# EAGLE board DX-HR (EAGLE 6.6.0)
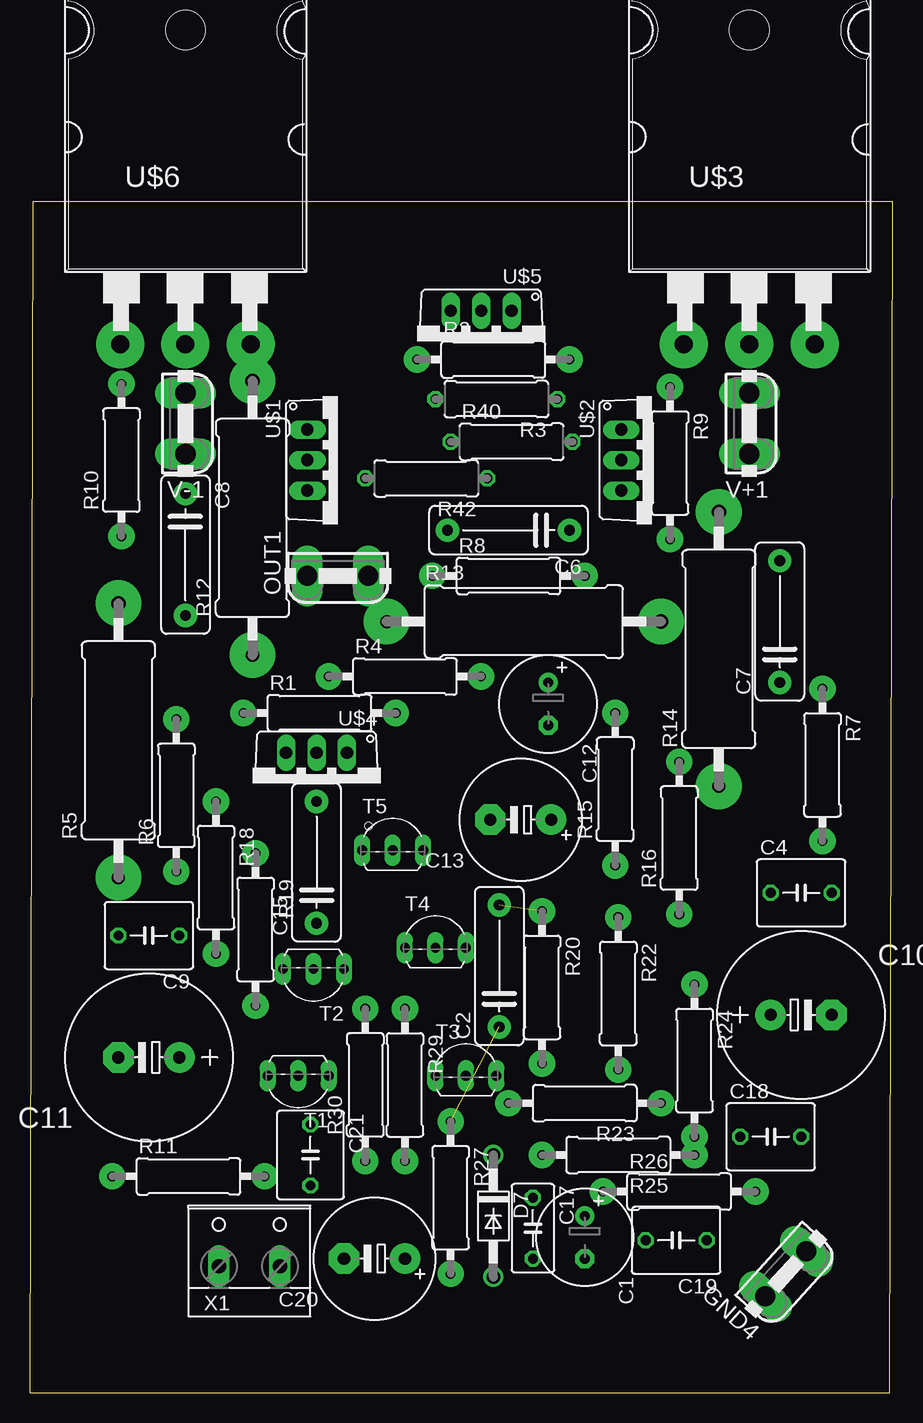
[diagram p0: board, top side]
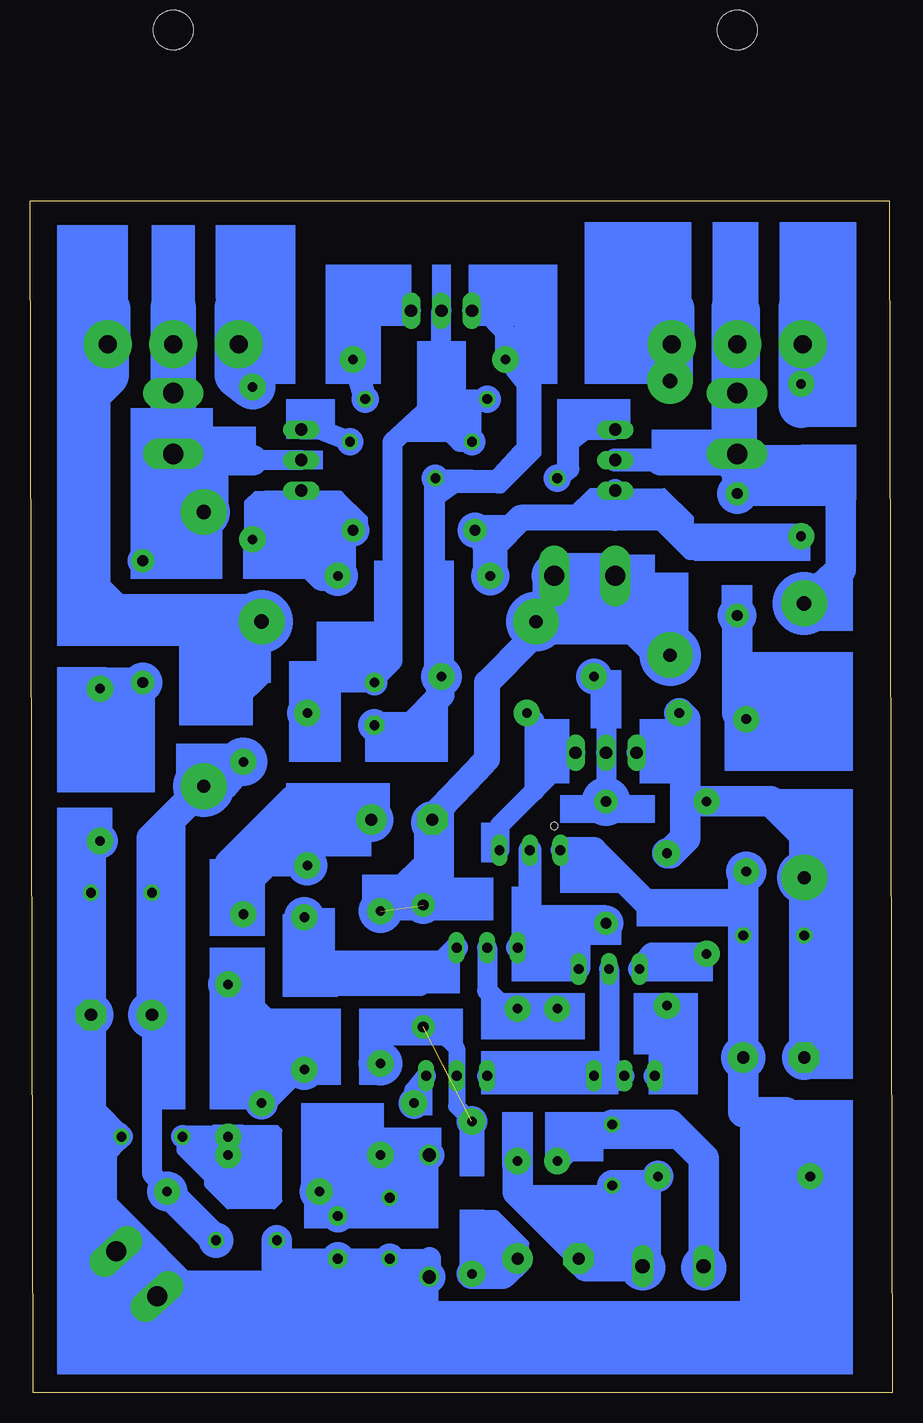
[diagram p1: board, bottom side, seen from below]

Size 71.88 x 99.31 mm. Coordinates in mm from the lower left corner, seen from the top.
Outline: 0,0 0.25,99.31 71.88,99.31 71.63,0 0,0
Copper layers (1*16): Top 0.035mm / dielectric 1.5mm / Bottom 0.035mm
Design rules "default *": minimum track width 10mil, minimum drill 30mil, track to track 8mil, track to pad 8mil, pad to pad 8mil, via to via 8mil, smd to smd 8mil, copper to edge 40mil, drill to drill 8mil, minimum pad ring 10mil, minimum via ring 8mil, stop-mask expansion 4mil, vias tented up to drill 0mil, thermal gap 10mil
Holes 0.6 mm at 28.19,47.26 28.19,159.02 241.55,159.02

## Footprints (pad centres in the part's own frame; a part is rotated, then mirrored left to right if it is on the bottom)
E3,5-8 = drill 0.813 pad 1.6: + -1.778,0 | drill 0.813 pad 1.6 octagon: - 1.778,0
C102-043X133 = drill 0.9 pad 1.93: 1 -5.08,0; 2 5.08,0
C050-055X075 = drill 0.813 octagon: 1 -2.54,0; 2 2.54,0
E5-13 = drill 1.016 pad 2.54: + -2.54,0 | drill 1.016 pad 2.54 octagon: - 2.54,0
E5-10,5 = drill 1.016 pad 2.54: + -2.54,0 | drill 1.016 pad 2.54 octagon: - 2.54,0
C050-035X075 = drill 0.813 octagon: 1 -2.54,0; 2 2.54,0
DO41-10 = drill 1.118: A 5.08,0; C -5.08,0
FASTON = drill 1.676 pad 2.54 long: 1 -2.54,0; 2 2.54,0
0309/12 = drill 0.8 pad 2.184: 1 -6.35,0; 2 6.35,0
0309/10 = drill 0.813 octagon: 1 -5.08,0; 2 5.08,0
0617/22 = drill 1.1 pad 3.81: 1 -11.43,0 | drill 1.2 pad 3.81: 2 11.43,0
TO92-CBE = drill 0.813 long: B 0,0; C -2.54,0; E 2.54,0
TO220AV = drill 1.016 long: B -2.54,-2.54; C 0,-2.54; E 2.54,-2.54
TO-264 = drill 1.5 pad 4: B -5.45,-6.096; E 5.45,-6.096 | drill 1.499 pad 4: C 0,-6.096 | hole 3.3: 0,20.09
W237-132 = drill 1.194 long: 1 -2.54,-0.635; 2 2.54,-0.635

## Placement (x,y rotation side)
C1  2u2  [E3,5-8]  46.23,12.97 270 top
C2  10pF  [C102-043X133]  39.12,35.58 90 top
C4  68nF  [C050-055X075]  64.26,41.68 0 top
C6  220nF  [C102-043X133]  39.88,71.9 180 top
C7  68nF  [C102-043X133]  62.48,64.28 90 top
C8  68nF  [C102-043X133]  12.95,69.87 270 top
C9  68nF  [C050-055X075]  9.91,38.12 180 top
C10  470uF  [E5-13]  64.26,31.52 0 top
C11  470uF  [E5-13]  9.91,27.96 180 top
C12  2.2uF  [E3,5-8]  43.18,57.42 270 top
C13  100uF  [E5-10,5]  40.89,47.77 180 top
C15  150pF  [C102-043X133]  23.88,44.22 90 top
C17  68nF  [C050-035X075]  41.91,13.74 270 top
C18  2n7  [C050-055X075]  61.72,21.36 0 top
C19  10nF  [C050-055X075]  53.85,12.72 180 top
C20  470uF  [E5-10,5]  28.7,11.2 180 top
C21  220pF  [C050-055X075]  23.37,19.83 270 top
D7  12V  [DO41-10]  38.61,14.75 270 top
GND4  GND  [FASTON]  62.99,9.93 47.7 top
OUT1  QFIT  [FASTON]  25.65,68.09 0 top
R1  1K2  [0309/12]  24.13,56.66 0 top
R2  720R  [0309/12]  38.61,86.13 0 top
R3  2K2  [0309/10]  38.86,82.82 180 top
R4  0R  [0309/12]  31.24,59.71 0 top
R5  470R  [0617/22]  7.37,54.38 90 top
R6  0R  [0309/12]  12.19,49.8 90 top
R7  0R  [0309/12]  66.04,52.34 270 top
R8  220R  [0309/12]  39.88,68.09 0 top
R9  5R6  [0309/12]  53.34,77.49 270 top
R10  5R6  [0309/12]  7.62,77.74 90 top
R11  10R  [0309/12]  13.21,18.05 0 top
R12  .22  [0617/22]  18.54,72.92 90 top
R13  .22  [0617/22]  41.15,64.28 0 top
R14  270R  [0617/22]  57.4,62 90 top
R15  3K3  [0309/12]  48.77,50.31 90 top
R16  2K2  [0309/12]  54.1,46.25 90 top
R18  47R  [0309/12]  15.49,42.95 270 top
R19  47R  [0309/12]  18.8,38.63 270 top
R20  12K  [0309/12]  42.67,33.8 270 top
R22  100R  [0309/12]  49.02,33.29 270 top
R23  100R  [0309/12]  46.23,24.15 180 top
R24  3K6  [0309/12]  55.37,27.71 270 top
R25  4K7  [0309/12]  49.02,19.83 180 top
R26  3K3  [0309/12]  54.1,16.78 0 top
R27  330R  [0309/12]  35.05,16.28 270 top
R29  12K  [0309/12]  31.24,25.67 270 top
R30  150R  [0309/12]  27.94,25.67 90 top
R40  100R  [0309/10]  40.13,79.27 0 top
R42  100R  [0309/10]  33.02,76.22 180 top
T1  BC546B  [TO92-CBE]  22.35,26.44 180 top
T2  BC546B  [TO92-CBE]  23.62,35.33 180 top
T3  BC556A  [TO92-CBE]  36.32,26.44 0 top
T4  BC556A  [TO92-CBE]  33.78,37.1 0 top
T5  BC546B  [TO92-CBE]  30.23,45.23 0 top
U$1  A1220AYS  [TO220AV]  25.65,77.74 270 top
U$2  C2690AYS  [TO220AV]  51.82,77.74 270 top
U$3  C5200OTU  [TO-264]  59.94,93.49 0 top
U$4  C2690AYS  [TO220AV]  23.88,50.82 180 top
U$5  BD13916  [TO220AV]  37.59,87.65 180 top
U$6  A1943OTU  [TO-264]  12.95,93.49 0 top
V+1  QFIT  [FASTON]  59.94,80.79 90 top
V-1  QFIT  [FASTON]  12.95,80.79 90 top
X1  [W237-132]  18.29,11.2 0 top

## Library data of the parts
C1 C2 C4 C6-C13 C15 C17-C21 R1-R16 R18-R20 R22-R27 R29 R30 R40 R42 = resistor
D7 = diode
GND4 OUT1 V+1 V-1 = keystone
T1-T5 = transistor-neu-to92
U$1 U$2 U$4 U$5 = transistor-power
U$3 U$6 = Rudi_TO264
X1 = con-wago-508

## Nets
AGND: C20.- C21.2 R11.2 R29.2 X1.2
N$1: R1.2 T5.E U$4.B
N$2: R2.2 R3.1 U$5.B
N$3: C8.2 R6.2
N$4: C12.+ R3.2 R15.2 R40.1 U$5.C
N$5: R40.2 U$2.B
N$6: C7.2 R14.2 U$2.C U$3.C V+1.1 V+1.2
N$7: C12.- R2.1 R4.2 R42.1 U$5.E
N$8: C15.2 R4.1 U$4.C
N$9: R42.2 U$1.B
N$10: C6.2 R8.1 R10.1 U$1.E
N$11: C7.1 R7.1
N$12: C6.1 R8.2 R9.2 U$2.E
N$16: C8.1 R5.2 U$1.C U$6.C V-1.1 V-1.2
N$17: R9.1 U$3.B
N$20: R10.2 U$6.B
N$21: C9.2 C11.- R1.1 R5.1 R18.1 R19.1 U$4.E
N$22: R12.2 U$6.E
N$24: R13.2 U$3.E
N$25: C4.1 C10.+ C19.1 R14.1 R16.2 R26.2
N$28: R29.1 R30.2 T4.B
N$30: C21.1 R30.1 X1.1
N$31: C13.+ R15.1 R16.1
N$34: C2.1 R20.2 R27.1 T3.B
N$35: R18.2 T2.E
N$36: T1.B T1.C T2.B T3.C
N$37: R22.1 T4.E
N$38: C15.1 T2.C T4.C T5.B
N$39: R19.2 T1.E
N$40: R23.2 T3.E
N$41: R22.2 R23.1 R24.1
N$42: C18.1 R24.2 R25.1
N$43: C1.+ C17.1 D7.C R25.2 R26.1
N$46: C20.+ R27.2
PE: C1.- C4.2 C9.1 C10.- C11.+ C17.2 C18.2 C19.2 D7.A GND4.1 GND4.2 R6.1 R7.2 R11.1 T5.C
VCCIO: C2.2 C13.- OUT1.1 OUT1.2 R12.1 R13.1 R20.1

## Tracks (layer width: path | path; a pad name or v marks a point on that pad's centre or on a via)
AGND
  Bottom 2.184: R11.2 20.83,16.78 20.83,16.28
  Bottom 2.54: C21.2 20.83,17.29 20.83,16.28 X1.2 25.53,10.56 C20.- 26.16,11.7 31.24,16.78 R29.2
N$1
  Bottom 1.676: T5.E 32.77,47.26 29.84,50.18 | 29.84,50.18 26.67,53.36 U$4.B | R1.2 29.84,56.03 29.84,50.18
N$2
  Bottom 1.676: U$5.B 43.43,90.19 44.96,88.67 R2.2
  Bottom 1.93: R2.2 R3.1
N$3
  Bottom 2.54: C8.2 12.95,56.66 R6.2
N$4
  Bottom 1.676: 37.59,82.32 U$5.C | 37.34,82.82 37.59,82.32 | 37.34,82.82 R3.2 | 37.34,82.82 38.61,82.06 41.66,79.27 41.66,60.98 43.18,59.46 C12.+ | R40.1 36.07,79.27 37.59,80.79 37.59,82.32
  Bottom 2.184: C12.+ 43.43,59.46 47.75,59.46 R15.2
N$5
  Bottom 1.676: R40.2 47.75,80.28 U$2.B
N$6
  Bottom 1.676: U$2.C 53.34,77.74
  Bottom 2.184: 58.42,77.74 V+1.1 | 59.94,79.01 60.45,79.01
  Bottom 2.54: C7.2 60.96,69.36 57.4,72.92 R14.2 | 53.34,77.74 58.42,77.74
  Bottom 3.81: R14.2 59.94,75.97 V+1.1 59.94,79.01 V+1.2 59.94,83.84 U$3.C 59.94,90.44
N$7
  Bottom 1.676: U$5.E 34.04,90.19 32.26,88.41 R2.1 31.5,85.36 30.48,84.09 30.48,78.76 33.02,75.97 36.32,75.97 | R42.1 37.59,75.71 36.32,75.97 | 36.32,75.97 38.1,74.7 38.1,60.47 37.85,59.71 R4.2
  Bottom 2.184: C12.- 40.13,55.65 37.59,58.19 R4.2
N$8
  Bottom 1.676: C15.2 U$4.C 23.88,58.95 R4.1
N$9
  Bottom 1.676: U$1.B 25.65,80.28 26.92,79.27 26.92,76.98 R42.2
N$10
  Bottom 1.93: 23.11,72.92 U$1.E | R8.1 33.53,68.6
  Bottom 2.184: R10.1 17.27,71.39 18.8,72.92 23.11,72.92 30.99,72.92 33.24,70.66 33.5,70.66 33.53,70.63 | 33.53,70.63 C6.2 | 33.53,70.63 R8.1
N$11
  Bottom 2.54: C7.1 65.79,59.2 R7.1
N$12
  Bottom 1.422: 49.28,74.19 U$2.E | 49.28,71.14 49.28,69.87
  Bottom 1.93: 49.28,71.14 R9.2 | 49.28,71.14 49.28,71.65 | C6.1 45.72,71.14 49.28,71.14
  Bottom 2.54: R8.2 47.5,68.09 49.28,69.87 | 49.28,71.14 49.28,74.19
N$15
  Bottom 3.81: 55.63,6.37 66.55,6.37 66.55,20.59
N$16
  Bottom 1.93: 19.3,77.74 U$1.C
  Bottom 2.54: R5.2 4.32,68.6 4.32,74.7 7.37,77.74 12.95,77.74 | 12.95,77.74 19.3,77.74 | C8.1 12.95,77.74
  Bottom 3.81: 12.95,77.74 V-1.1 13.21,78.51 13.21,90.44 12.95,90.19 U$6.C V-1.2
N$17
  Bottom 3.81: R9.1 54.61,84.86 54.61,90.44 54.49,90.33 U$3.B
N$18
  Bottom 2.184: 45.72,49.55 50.04,49.55 55.37,44.22 55.37,43.71
N$19
  Bottom 0.406: 56.9,17.55 59.44,20.09 59.44,21.86
N$20
  Bottom 3.81: 7.62,82.32 R10.2 7.62,90.44 7.5,90.33 U$6.B
N$21
  Bottom 1.676: U$4.E 17.27,53.36
  Bottom 2.54: C11.- C9.2 R5.1 7.37,46.5 10.16,49.3 R18.1 17.27,49.3 | R1.1 17.27,56.15 17.27,53.36 17.27,49.3 | 17.27,49.3 17.27,46.25 18.54,44.98 R19.1
N$22
  Bottom 3.81: R12.2 18.54,90.44 18.4,90.31 U$6.E
N$24
  Bottom 3.81: R13.2 64.52,64.28 67.06,66.82 67.06,83.33 65.53,84.86 65.53,90.44 65.39,90.31 U$3.E
N$25
  Bottom 1.676: R26.2 61.72,18.31 C10.+
  Bottom 2.54: C10.+ C4.1 61.72,46.25 R14.1 55.88,50.57 R16.2 | R26.2 C19.1
N$27
  Bottom 0.406: 56.9,18.56 58.67,20.34 | 58.67,20.34 58.93,20.34 | 58.67,20.34 58.17,20.34
N$28
  Bottom 1.422: R30.2 R29.1
  Bottom 1.676: T4.B 33.78,33.55 32.26,32.02 R30.2
N$30
  Bottom 1.93: C21.1 24.89,22.37 R30.1
  Bottom 2.54: X1.1 15.75,19.58 18.54,22.37 C21.1
N$31
  Bottom 1.93: R16.1 54.1,41.93 52.07,43.96 R15.1
  Bottom 2.184: C13.+ 47.5,46.76 49.27,45.13 R15.1
N$33
  Bottom 0.406: 65.53,19.58 64.26,20.85 64.26,21.1
N$34  (1 unrouted)
  Bottom 1.422: R27.1 36.32,23.9 T3.B 36.32,28.72 37.59,29.99 41.66,29.99 42.67,28.98 R20.2
N$35
  Bottom 1.93: R18.2 20.07,36.6 T2.E
N$36
  Bottom 1.676: 23.62,26.44 T1.C T3.C | 23.62,26.44 T1.B | T2.B 23.62,26.44
N$37
  Bottom 1.93: T4.E 39.37,34.06 46.74,34.06 49.02,36.85 R22.1
N$38
  Bottom 1.93: 26.42,39.14 29.21,39.14 29.34,39.01 | 26.42,39.14 C15.1 | 29.34,39.01 T4.C | T2.C 26.16,38.88 26.42,39.14 | T5.B 30.23,39.9 29.34,39.01
N$39
  Bottom 1.93: T1.E 18.8,27.45 R19.2
N$40
  Bottom 1.676: T3.E 39.88,25.17 R23.2
N$41
  Bottom 2.184: R23.1 49.78,26.94 R22.2 49.02,27.71 R24.1
N$42
  Bottom 1.676: R24.2 R25.1
  Bottom 1.93: C18.1 R24.2
N$43
  Bottom 1.93: C1.+ 46.23,16.78
  Bottom 2.54: R25.2 D7.C | R25.2 46.23,16.78 R26.1 | C17.1 42.67,17.04 R25.2
N$44
  Bottom 0.406: 65.02,19.58 64.01,20.59 64.01,21.36 65.79,23.13 66.04,23.13
N$46
  Bottom 2.54: C20.+ 32.51,9.93 R27.2
N$47
  Bottom 0.406: 64.26,22.12 65.53,23.39 66.04,23.39
N$48
  Bottom 0.406: 64.01,22.12 65.79,23.9 66.29,23.9
N$49
  Bottom 0.406: 38.61,75.97 38.86,75.71 38.86,59.71
N$51
  Bottom 0.406: 34.8,76.47 35.05,76.73 | 35.05,76.73 37.85,76.73 | 35.05,76.73 32.77,76.73
N$52
  Bottom 0.406: 29.72,84.6 29.72,78.51 33.02,75.2 | 33.02,75.2 36.32,75.2 | 33.02,75.2 32.51,75.2 29.46,78.25 29.46,84.09
N$53
  Bottom 0.406: 16.26,69.62 17.02,69.62 19.81,72.41 20.57,72.41
N$54
  Bottom 0.406: 44.96,70.63 44.96,68.85 45.47,69.36 45.47,70.38 45.21,70.12 45.21,69.36
N$55
  Bottom 0.406: 45.21,72.92 45.47,73.17 46.99,73.17 46.74,72.92 45.47,72.92
N$56
  Bottom 0.406: 52.07,74.95 53.09,74.95 53.85,74.19 53.85,71.9 | 52.07,72.41 53.34,72.41 53.85,71.9 | 53.85,71.9 53.85,71.65 53.85,71.39 53.09,72.16 52.32,72.16
N$57
  Bottom 0.406: 52.32,74.7 52.83,74.7 53.59,73.93 53.59,72.66 | 53.59,72.66 52.58,72.66 52.32,72.92 52.32,74.44 52.83,74.44 52.83,72.92 52.58,73.17 52.58,74.19 53.09,74.19 53.09,72.92 53.34,72.92 53.34,73.93 | 53.59,72.66 53.59,72.41 53.34,72.66 52.32,72.66
N$58
  Bottom 0.406: 22.35,75.2 19.05,75.2 16.76,72.92 16.76,71.65 17.02,71.9 17.02,72.66 18.54,74.19 21.59,74.19 21.59,74.44 18.54,74.44 18.8,74.7 | 18.8,74.7 19.05,74.95 21.59,74.95 21.59,74.7 18.8,74.7
N$59
  Bottom 0.406: 16.26,70.38 17.53,70.38 17.27,70.12 16.51,70.12 16.76,69.87 17.02,69.87
N$60
  Bottom 0.406: 24.13,75.2 25.15,75.2 26.92,73.43 | 26.92,73.43 27.69,73.43 | 26.92,73.43 26.16,73.43 24.64,74.95 25.15,74.95 25.91,74.19 25.91,73.93 24.64,73.93 24.64,74.7 25.15,74.19 24.89,74.19
N$61
  Bottom 0.406: 32.26,68.6 32.26,70.38
N$65
  Bottom 0.406: 34.54,70.63 34.8,70.38 | 34.8,70.38 34.8,68.35 | 34.8,70.38 34.8,70.89
N$66
  Bottom 0.406: 32.26,72.92 34.54,72.92 34.29,72.66 32.51,72.66 33.02,72.16 33.53,72.16 33.27,72.41 33.02,72.41
N$67
  Bottom 0.406: 46.99,74.95 45.97,74.95 43.94,72.92 43.94,71.65
N$68
  Bottom 0.406: 44.45,72.92 45.97,74.44 46.23,74.44 45.21,73.43 45.21,73.17 45.97,73.93 46.23,73.93 45.72,73.43
N$69
  Bottom 0.406: 52.07,59.71 52.07,59.46 54.36,57.17 54.36,56.66 53.59,57.42 53.59,58.44 52.83,59.2 | 52.83,59.2 52.58,59.2 | 52.83,59.2 53.34,59.2 53.59,58.95
N$71
  Bottom 0.406: 30.48,11.45 30.48,12.47 33.02,15.01 35.56,15.01 34.04,13.48 33.78,13.48 | 33.78,13.48 31.75,13.48 31.75,12.21 31.5,12.47 31.5,13.23 31.24,12.97 31.24,12.47 30.73,12.47 33.02,14.75 33.78,14.75 33.78,13.48 | 33.78,13.48 34.04,13.74 34.04,14.75 33.27,13.99 | 33.02,13.74 32.51,13.74 | 33.02,13.74 33.53,13.74 33.53,14.5 33.02,14.5 33.02,13.74 | 33.02,13.74 33.27,13.99 | 33.27,13.99 33.27,14.24 32.77,14.24 32.51,13.99 | 32.26,13.74 32.51,13.99 | 32.51,13.99 32.77,13.99
N$72
  Bottom 0.406: 55.12,22.12 51.31,22.12 51.05,21.86 51.05,16.02 51.56,15.51 55.37,15.51 57.15,17.29 57.15,18.31 | 56.9,18.05 57.15,18.31 | 57.15,18.31 59.18,20.34
N$73
  Bottom 0.406: 51.31,17.29 56.9,17.29 55.37,15.77 51.56,15.77 51.31,16.02 51.31,17.04 56.39,17.04 55.37,16.02 51.56,16.02 51.56,16.53 | 51.56,16.53 51.56,16.78 55.88,16.78 55.63,16.53 51.56,16.53 | 51.56,16.53 51.82,16.28 55.37,16.28
PE
  Bottom 1.422: GND4.2 63.46,10.56 61.09,10.56
  Bottom 1.676: 38.61,11.2 C17.2 C1.- 50.29,11.2 | 26.92,45.23 T5.C
  Bottom 1.93: C9.1 12.19,41.17 | C18.2 64.52,21.61 66.8,21.61 | 38.61,11.2 D7.A
  Bottom 2.184: C11.+ C9.1 12.7,40.91 20.57,40.91 24.89,45.23 26.92,45.23 | R11.1 6.6,17.8 6.6,12.21
  Bottom 2.54: 66.8,16.28 66.8,21.61 C10.- C4.2 66.8,45.23 R7.2 | 41.91,6.12 41.66,5.86 8.38,5.86 6.6,7.64 6.6,12.21 6.6,21.36 8.89,23.39 12.45,23.39 C11.+ 12.45,43.2 R6.1 | 41.91,6.12 C17.2 | 41.91,6.12 42.16,5.86 51.31,5.86 | 66.55,16.28 56.13,5.86 | 66.8,16.28 66.55,16.28 | 66.55,16.28 66.8,16.02 66.8,14.5 58.17,5.86 | 57.4,5.86 58.17,5.86 | 56.13,5.86 57.4,5.86 | 56.13,5.86 51.31,5.86 | 57.4,5.86 59.59,8.05 GND4.1 | 64.7,11.47 65.23,10.94 65.28,10.94 60.45,6.12 | 58.17,5.86 60.2,5.86 60.45,6.12 | 66.8,16.28 66.8,12.21 60.45,6.12 | 51.31,5.86 C19.2
  Bottom 3.81: 64.7,11.47 GND4.2
VCCIO  (1 unrouted)
  Bottom 2.184: R13.1 30.23,63.77 30.23,62.76 33.78,59.2 33.78,52.85 34.75,51.8 38.61,47.77 38.61,46.25
  Bottom 2.54: 42.93,40.15 R20.1 38.61,43.96 38.61,46.25 C13.-
  Bottom 3.81: R12.1 21.34,64.28 25.65,64.28 | R13.1 25.65,64.28 | OUT1.1 OUT1.2 25.91,65.81 23.62,65.81 24.38,65.04 25.65,65.04 25.65,64.28
(copper drawn outside any net)
  shapes: Bottom area x265, Bottom circle x69